# Altium PCB attenuator-pcb - 4.PcbDoc
Units mm, origin at the board's own origin, x right, y up, seen from the top; angles counter-clockwise.
Board outline 38.59 x 24.43 mm, 2 copper layers (Top Layer, Bottom Layer), stack 1.56 mm thick; 12 components, 37 nets, 30 pads, 38 vias.
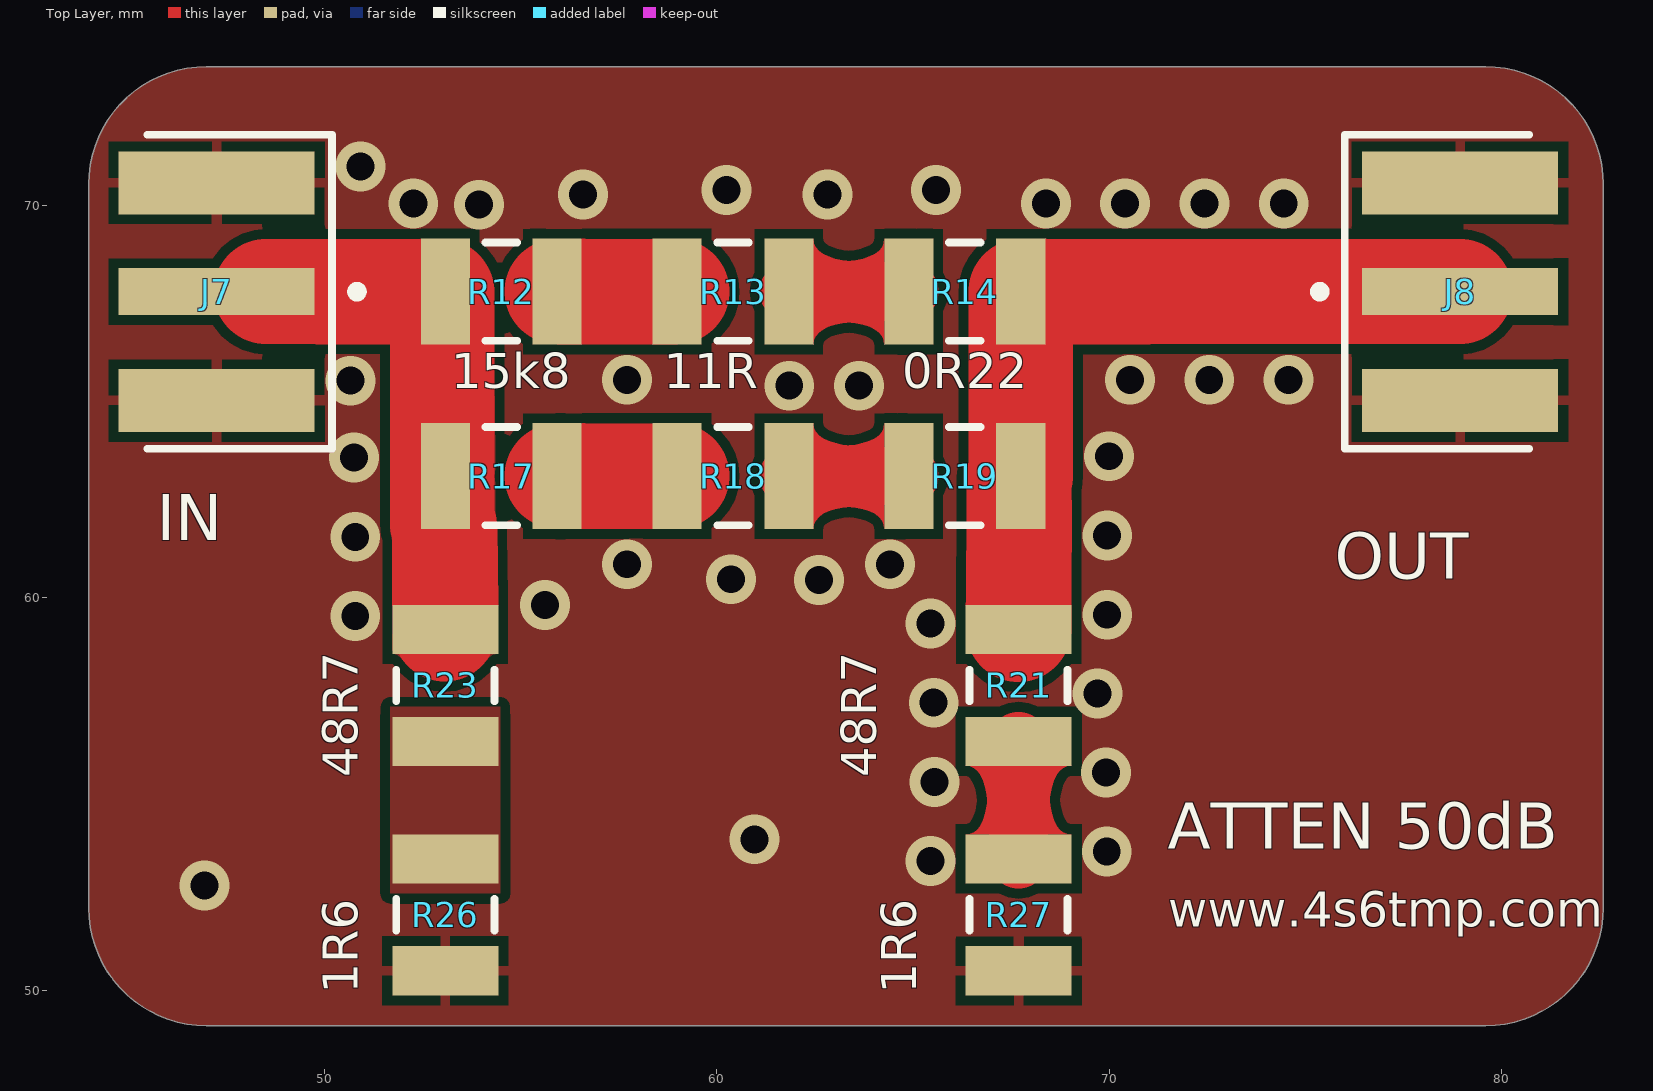
[diagram p0: Top Layer view]
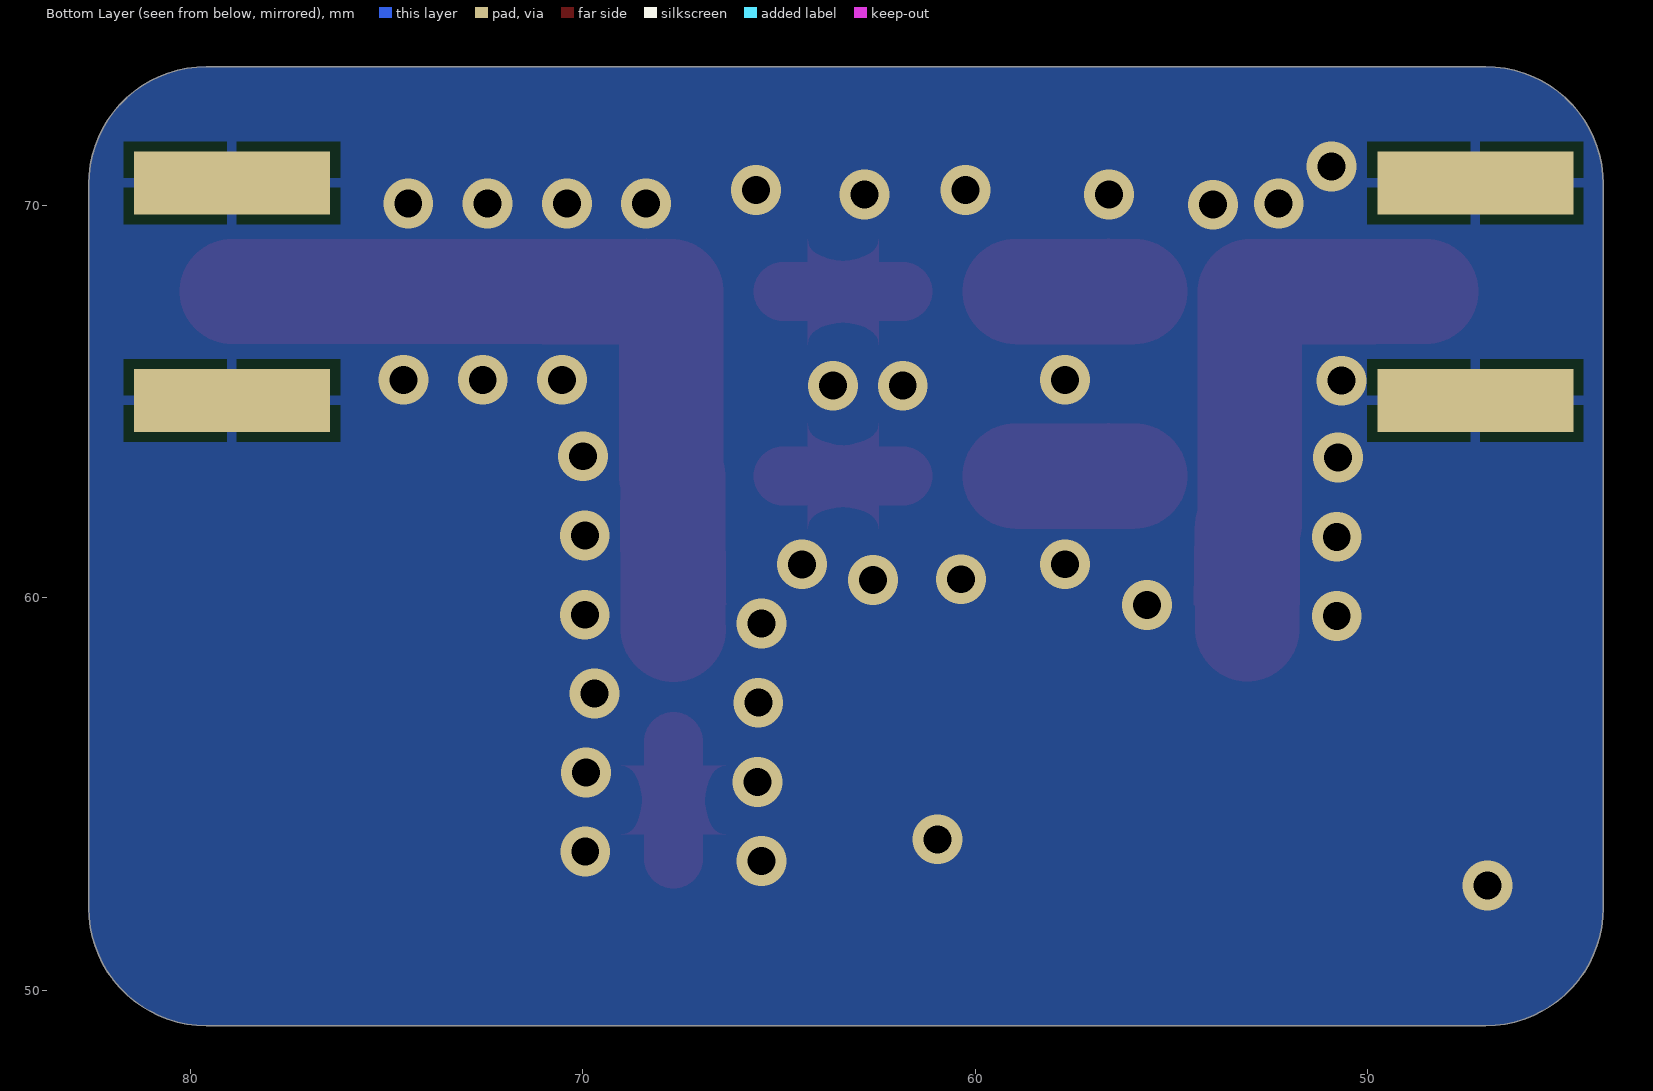
[diagram p1: Bottom Layer view, seen from below]

## Layer stack, top to bottom
Top Solder: solder mask 0.0203, Solder Resist, Dk 3.8
Top Layer: signal copper 0.035
Prepreg 7628: dielectric 1.49, FR-4, Dk 4.6
Bottom Layer: signal copper 0.035
Bottom Solder: solder mask 0.0203, Solder Resist, Dk 3.8

## Board outline
44,52.101 44,70.533 cw(c47,70.533) 47,73.533 79.59,73.533 cw(c79.59,70.533) 82.59,70.533 82.59,52.101 cw(c79.59,52.101) 79.59,49.101 47,49.101 cw(c47,52.101)

## Design rules (kind name [scope] priority, off if disabled: settings)
Clearance [All] p1: gap=0.254 ignorepadtopadclearanceinfootprint=FALSE except(0: Arc-Hole Track-Hole SMDPad-Hole THPad-Hole Via-Hole Fill-Hole Poly-Hole Region-Hole Text-Hole)
HoleToHoleClearance [All] p1: gap=0.1 allowstackedmicrovias=TRUE
MinimumSolderMaskSliver [All] p1 off: minsoldermaskwidth=0.1
PolygonConnect [All] p1: connectstyle=Relief reliefconductorwidth=0.254 reliefentries=4 polygonreliefangle="90 Angle" airgapwidth=0.254
RoomDefinition schematic [InComponentClass('schematic')] p1: confinementstyle=ConfineIn formatcopy=TRUE lockcomponents=FALSE outline 28.829,46.101 94.869,46.101 94.869,73.533 28.829,73.533
RoutingVias [All] p1: holewidth=0.711 width=1.27 viastyle="Through Hole" minholewidth=0.711 minwidth=1.27 maxholewidth=0.711 maxwidth=1.27
SolderMaskExpansion [All] p1: expansion=0.102 istentingtop=FALSE
Width [All] p1: maxlimit=3 minlimit=1.5 preferedwidth=2.673 impedanceprofiledriven=TRUE impedanceprofileid={88FF0C83-8680-40BB-AEE6-F79FA2882ED4} impedanceprofilevalue=50.000000 minimp=50.000000 maximp=50.000000 favimp=50.000000
Width Width_1 [All] p2: maxlimit=2 minlimit=0.254 preferedwidth=1 minimp=50.000000 maximp=50.000000 favimp=50.000000
28 further rules are at their usual default settings.

## Components (designator, comment, footprint, x,y, rotation, side; value= is the part's Value field where it differs from the comment)
J7 "IN" FP-CON-SMA-EDGE-S-MFG 40,67.8 r90 top
J8 "OUT" FP-CON-SMA-EDGE-S-MFG 86.2,67.8 r270 top
R12 "15k8" RESC3225X70X50NL20T20 54.511,67.8 r0 top
R13 "11R" RESC3225X70X50NL20T20 60.417,67.8 r0 top
R14 "0R22" RESC3225X70X50NL20T20 66.322,67.8 r0 top
R17 "15k8" RESC3225X70X50NL20T20 54.511,63.101 r0 top
R18 "11R" RESC3225X70X50NL20T20 60.417,63.101 r0 top
R19 "0R22" RESC3225X70X50NL20T20 66.322,63.101 r0 top
R21 "48R7" RESC3225X70X50NL20T20 67.691,57.767 r90 top
R23 "48R7" RESC3225X70X50NL20T20 53.086,57.767 r90 top
R26 "1R6" RESC3225X70X50NL20T20 53.086,51.925 r90 top
R27 "1R6" RESC3225X70X50NL20T20 67.691,51.925 r90 top

## Footprints (in the part's own frame and the unit in brackets; to place one, negate y for a bottom-side part, rotate by r counter-clockwise, add the part's x,y. Pads: shape width x height; smd on the part's side, far side on the other; paste and mask are expansions set on the pad)
FP-CON-SMA-EDGE-S-MFG [mm]
  rect 1.2x5 smd paste+0 mask+0: 1(0,-7.26)
  rect 1.6x5 smd paste+0 mask+0: 2(-2.77,-7.26) 3(2.77,-7.26)
  rect 1.6x5 smd far side paste+0 mask+0: 4(-2.77,-7.26) 5(2.77,-7.26)
  silkscreen extent -4,-10.96 4,-5.5, body extent -3.67,-9.86 3.67,4.86, height 0.25
RESC3225X70X50NL20T20 [mm] "Chip Resistor, 2-Leads, Body 3.20x2.50mm, IPC Medium Density"
  rect 1.25x2.7 smd: 1(-1.425,0) 2(1.425,0)
  silkscreen extent -0.4,-1.25 0.4,1.25, body extent -1.7,-1.35 1.7,1.35, height 0.7

## Part data
J7 J8: library part CMP-204357-000001-1, "CONN SMA JACK STR EDGE MNT", Frequency=18GHz, Manufacturer="RF Solutions Ltd.", Manufacturer Part Number=CON-SMA-EDGE-S, Package=CONN_JACK, Automotive=No, Category=Conn, ComponentLink2Description=Datasheet, ComponentLink2URL=https://www.rfsolutions.co.uk/downloads/1498648656DS-CON-EDGE-SMA-4.pdf, Conn Orientation="Right Angle", Contact Material=Gold, Device Class L1=Connectors, Device Class L2="RF / Coaxial Connectors", Device Class L3=unset, Digikey Description="CONN SMA JACK STR EDGE MNT", Footprint Url=https://forum.upverter.com/uploads/default/original/3X/b/e/be75b907af57498775929d6d9099689c472e0307.pdf, Height=6.35mm, Impedance=50Ω, Is Female=yes, Lead Free=Yes, Number Of Contacts=1, Octopart=https://octopart.com/con-sma-edge-s-rf+solutions-70967450, RoHS=TRUE, Shielding=true
R12 R13 R14 R17 R18 R19 R21 R23 R26 R27: library part CMP-2005-01957-1, Manufacturer=Panasonic, Part Number=ERJ-14NF1001U

## Via types
v1: diameter 1.27, hole 0.711, Top Layer to Bottom Layer, 38 vias

## Nets (pads, with @x,y where several pads share a name; then routed paths per layer and width w, separated by ;. In a path a pad name is that pad's centre, name@x,y a point inside that pad or via, vN(x,y) a via of type N, cw(c..) or ccw(c..) an arc to the next point about the centre after c; other vN are vias at no path point)
GND: J7.2 J7.3 J7.4 J7.5 J8.2 J8.3 J8.4 J8.5 R26.1 R27.1
  other v1: 46.95,52.675 65.444,53.292 69.938,53.535 60.96,53.848 65.548,55.309 69.916,55.554 65.529,57.329 69.704,57.563 65.444,59.347 50.792,59.535 69.949,59.568 55.626,59.817 62.611,60.452 60.363,60.473 57.717,60.856 64.415,60.854 50.792,61.555 69.949,61.588 50.764,63.575 69.992,63.608 61.849,65.405 63.627,65.405 50.673,65.532 57.717,65.555 70.529,65.555 72.549,65.555 74.569,65.555 53.943,70.016 52.271,70.045 68.387,70.045 70.407,70.045 72.427,70.045 74.447,70.045 56.596,70.277 62.821,70.276 60.253,70.387 65.587,70.387 50.927,70.993
NetJ1_1: 
NetJ2_1: 
NetJ3_1: 
NetJ4_1: 
NetJ5_1: 
NetJ6_1: 
NetJ7_1: J7.1 R12.1 R17.1 R23.2 | length 13.1
  Top Layer w2.673: J7.1@48.514,67.8 52.995,67.8 53.009,67.786 R17.1@53.009,63.114 ; R17.1@53.009,63.087 53.009,61.889 53.072,61.825 R23.2@53.072,59.205
NetJ8_1: J8.1 R14.2 R19.2 R21.2 | length 19.8
  Top Layer w2.673: R21.2 67.705,59.205 67.705,63.087 67.718,63.101 R19.2 R14.2 J8.1
NetJ9_1: 
NetJ10_1: 
NetJ11_1: 
NetJ12_1: 
NetR1_2: 
NetR2_2: 
NetR4_2: 
NetR6_1: 
NetR7_1: 
NetR12_2: R12.2 R13.1 | length 3.1
  Top Layer w2.673: R12.2 R13.1
NetR13_2: R13.2 R14.1 | length 3.1
  Top Layer w1.5: R13.2 R14.1
NetR15_2: 
NetR17_2: R17.2 R18.1 | length 3.1
  Top Layer w2.673: R17.2 R18.1
NetR18_2: R18.2 R19.1 | length 3.1
  Top Layer w1.5: R18.2 R19.1
NetR20_1: 
NetR21_1: R21.1 R27.2 | length 3
  Top Layer w1.5: R27.2 R21.1
NetR22_1: 
NetR23_1: R23.1 R26.2
NetR24_1: 
NetR25_1: 
NetR30_2: 
NetR32_2: 
NetR34_1: 
NetR35_1: 
NetR36_1: 
NetR37_1: 
NetR38_1: 
NetR39_1: 

## Polygon pours and split planes (outlines as drawn)
GND on Top Layer "Top Layer-No Net" (solid, pour order 20): 44,52.101 44,70.533 cw(c47,70.533) 47,73.533 79.59,73.533 cw(c79.59,70.533) 82.59,70.533 82.59,52.101 cw(c79.59,52.101) 79.59,49.101 47,49.101 cw(c47,52.101)
GND on Top Layer "Top Layer-GND 17" (solid, pour order 14): 65.822,65.958 66.11,65.87 66.376,65.728 66.608,65.537 66.8,65.305 66.942,65.039 67.029,64.751 67.058,64.451 67.058,63.848 67.062,63.836 67.083,63.791 67.105,63.693 67.135,63.596 67.14,63.546 67.151,63.497 67.177,63.301 67.178,63.251 67.187,63.201 67.183,63.101 67.187,63 67.178,62.951 67.177,62.9 67.151,62.705 67.14,62.655 67.135,62.605 67.105,62.509 67.083,62.411 67.062,62.365 67.058,62.354 67.058,61.751 67.029,61.451 66.942,61.163 66.8,60.897 66.608,60.664 66.376,60.473 66.11,60.331 65.822,60.244 65.522,60.214 64.272,60.214 64.2,60.222 64.175,60.221 64.127,60.229 63.972,60.244 63.899,60.266 63.878,60.27 63.839,60.284 63.684,60.331 63.614,60.369 63.596,60.376 63.565,60.395 63.418,60.473 63.369,60.514 63.32,60.473 63.174,60.395 63.142,60.376 63.125,60.369 63.054,60.331 62.9,60.284 62.86,60.27 62.84,60.266 62.766,60.244 62.612,60.229 62.563,60.221 62.539,60.222 62.466,60.214 61.216,60.214 60.917,60.244 60.629,60.331 60.363,60.473 60.13,60.664 59.939,60.897 59.797,61.163 59.71,61.451 59.68,61.751 59.68,62.354 59.677,62.365 59.656,62.411 59.633,62.509 59.604,62.605 59.599,62.655 59.587,62.705 59.562,62.9 59.56,62.951 59.552,63 59.555,63.101 59.552,63.201 59.56,63.251 59.562,63.301 59.587,63.497 59.599,63.546 59.604,63.596 59.633,63.693 59.656,63.791 59.677,63.836 59.68,63.848 59.68,64.451 59.71,64.751 59.797,65.039 59.939,65.305 60.13,65.537 60.363,65.728 60.629,65.87 60.917,65.958 61.216,65.987 62.466,65.987 62.539,65.98 62.563,65.981 62.612,65.973 62.766,65.958 62.84,65.936 62.86,65.932 62.9,65.917 63.054,65.87 63.125,65.833 63.142,65.826 63.174,65.807 63.32,65.728 63.369,65.688 63.418,65.728 63.565,65.807 63.596,65.826 63.614,65.833 63.684,65.87 63.839,65.917 63.878,65.932 63.899,65.936 63.972,65.958 64.127,65.973 64.175,65.981 64.2,65.98 64.272,65.987 65.522,65.987
GND on Top Layer "Top Layer-GND 15" (solid, pour order 12): 387 vertices, not listed, extent 53.055,60.216 67.187,70.684
GND on Top Layer "Top Layer-GND 16" (solid, pour order 11): 172 vertices, not listed, extent 64.805,51.06 81.314,70.686
GND on Top Layer "Top Layer-GND 18" (solid, pour order 10): 44.506,70.684 44.506,64.915 50.124,64.915 50.124,63.114 50.134,63.014 50.138,62.914 50.153,62.801 50.153,58.42 50.182,58.12 50.269,57.832 50.411,57.566 50.603,57.334 50.835,57.142 51.101,57 51.389,56.913 51.689,56.884 54.356,56.884 54.656,56.913 54.944,57 55.21,57.142 55.442,57.334 55.634,57.566 55.776,57.832 55.863,58.12 55.892,58.42 55.892,62.916 55.885,62.991 55.885,63.029 55.894,63.114 55.894,67.786 55.889,67.837 55.89,67.887 55.882,67.937 55.88,67.987 55.856,68.174 55.834,68.336 55.829,68.358 55.823,68.385 55.818,68.435 55.789,68.531 55.766,68.629 55.745,68.675 55.731,68.723 55.612,69.009 55.596,69.048 55.586,69.067 55.572,69.093 55.554,69.14 55.501,69.225 55.454,69.314 55.422,69.353 55.395,69.396 55.322,69.491 55.181,69.675 55.147,69.712 55.132,69.732 55.131,69.738 54.989,70.004 54.797,70.236 54.565,70.427 54.299,70.569 54.011,70.657 53.711,70.686 52.461,70.686 52.441,70.684
NetJ7_1 on Top Layer "NETJ7_1_L01_P019" (solid, remove dead copper, pour order 19): 54.356,65.151 54.356,58.42 51.689,58.42 51.689,65.151
NetR23_1 on Top Layer "NETR23_1_L01_P003" (solid, remove dead copper, pour order 3): 51.689,57.221 54.483,57.221 54.483,52.471 51.689,52.471
GND on Bottom Layer "Top Layer-GND" (solid, pour order 21): 44,52.101 44,70.533 cw(c47,70.533) 47,73.533 79.59,73.533 cw(c79.59,70.533) 82.59,70.533 82.59,52.101 cw(c79.59,52.101) 79.59,49.101 47,49.101 cw(c47,52.101)

## Silkscreen, mask and mechanical layers (free items; w line width, h text height)
Top Overlay:
  text "ATTEN 50dB" at 71.493,53.227 h2
  text "www.4s6tmp.com" at 71.501,51.325 h1.52
Mechanical 1:
  the board outline again, w0.254